# EAGLE board sensor fix (EAGLE 5.06)
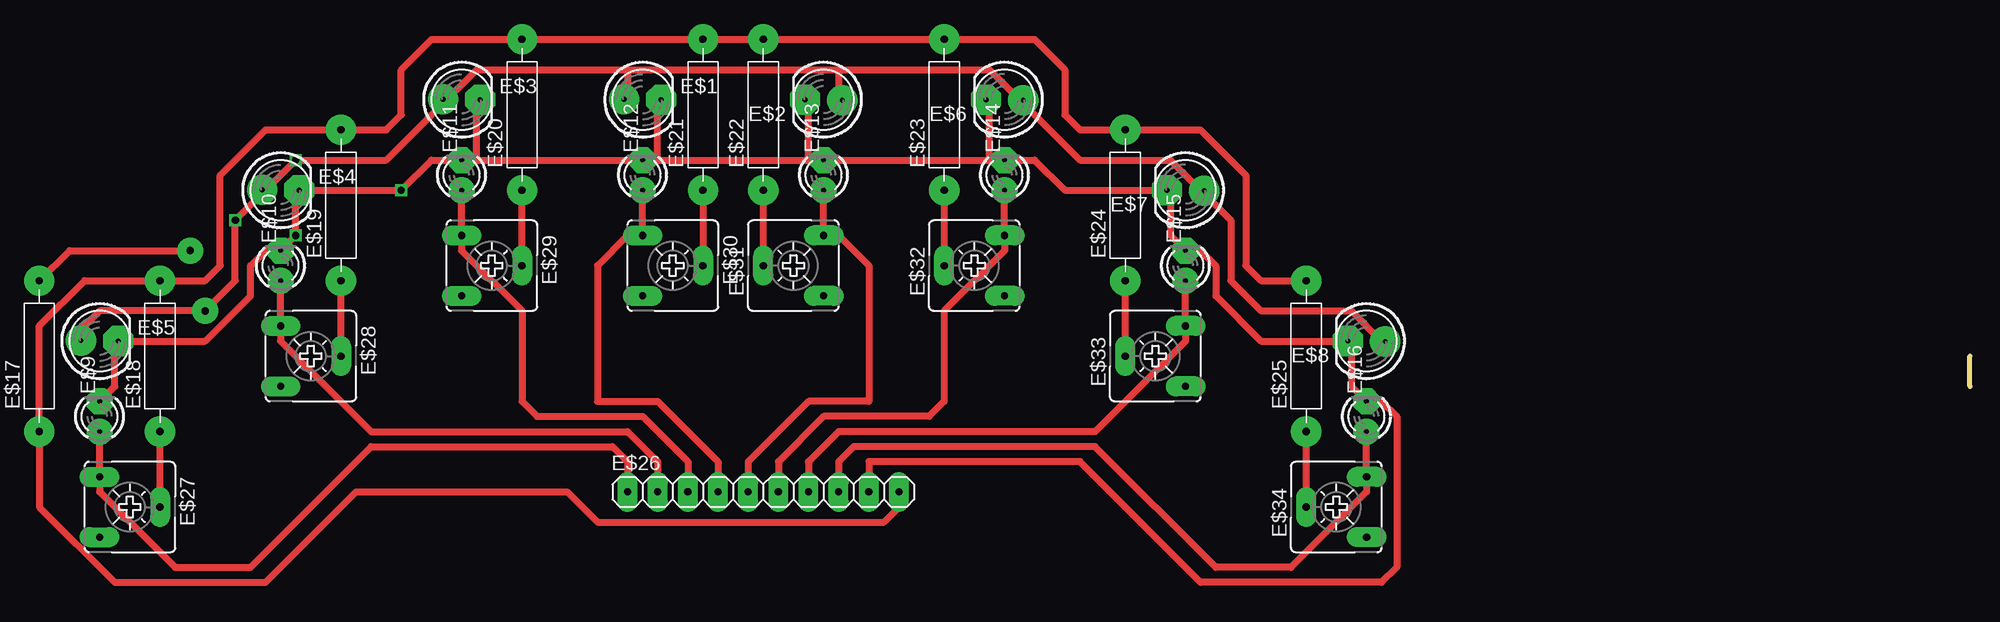
[diagram p0: board, top side]
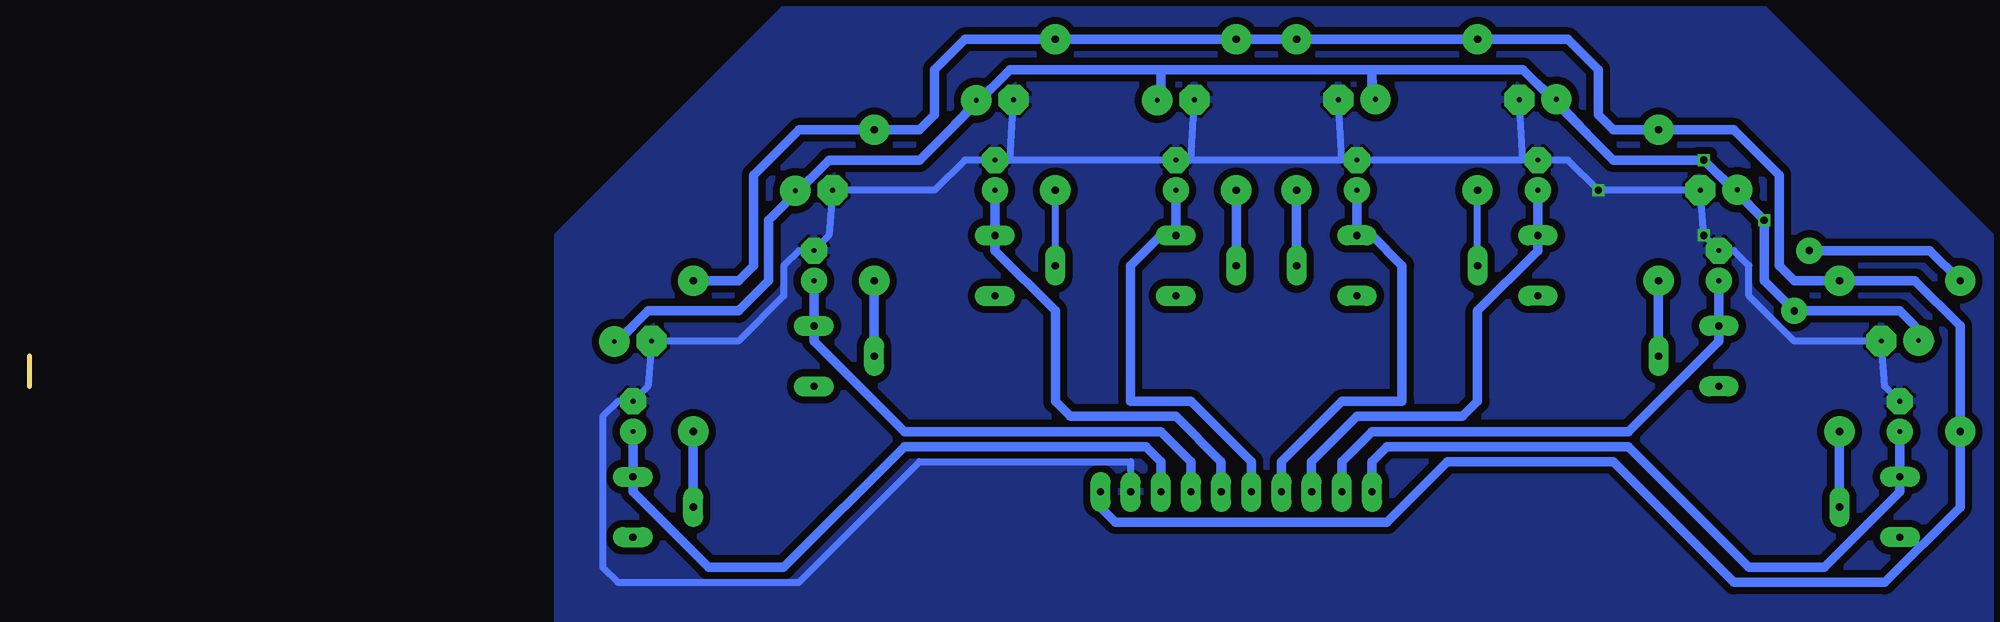
[diagram p1: board, bottom side, seen from below]

Size 0 x 2.54 mm. Coordinates in mm from the lower left corner, seen from the top.
Outline: 0,0 0,2.54
Copper layers (1*16): Top 0.035mm / dielectric 1.5mm / Bottom 0.035mm
Design rules "default": minimum track width 10mil, minimum drill 24mil, track to track 8mil, track to pad 8mil, pad to pad 8mil, via to via 8mil, smd to smd 8mil, copper to edge 40mil, drill to drill 8mil, minimum pad ring 10mil, minimum via ring 8mil, stop-mask expansion 4mil, vias tented up to drill 0mil, thermal gap 10mil

## Footprints (pad centres in the part's own frame; a part is rotated, then mirrored left to right if it is on the bottom)
LED5MM = drill 0.406 pad 2.54 round: A -1.568,0.044 | drill 0.406 pad 2.54 octagon: K 1.568,0
LED3MM = drill 0.406 pad 2.184 round: A -1.27,0 | drill 0.406 pad 2.184 octagon: K 1.27,0
R-12,5 = drill 0.61 pad 2.54 round: 1 -6.35,0; 2 6.35,0
1X10 = drill 0.6 pad 1.676 long: 1 -11.43,0; 2 -8.89,0; 3 -6.35,0; 4 -3.81,0; 5 -1.27,0; 6 1.27,0; 7 3.81,0; 8 6.35,0; 9 8.89,0; 10 11.43,0
CA6V = drill 0.61 pad 1.676 long: A -2.54,-2.54; E 2.54,-2.54; S 0,2.54

## Placement (x,y rotation side)
E$1  [LED5MM]  -111.76,24.13 0 top  (outside the outline)
E$2  [LED5MM]  -96.52,24.13 180 top  (outside the outline)
E$3  [LED5MM]  -127,24.13 0 top  (outside the outline)
E$4  [LED5MM]  -142.24,16.51 0 top  (outside the outline)
E$5  [LED5MM]  -157.48,3.81 0 top  (outside the outline)
E$6  [LED5MM]  -81.28,24.13 180 top  (outside the outline)
E$7  [LED5MM]  -66.04,16.51 180 top  (outside the outline)
E$8  [LED5MM]  -50.8,3.81 180 top  (outside the outline)
E$9  [LED3MM]  -157.48,-2.54 90 top  (outside the outline)
E$10  [LED3MM]  -142.24,10.16 90 top  (outside the outline)
E$11  [LED3MM]  -127,17.78 90 top  (outside the outline)
E$12  [LED3MM]  -111.76,17.78 90 top  (outside the outline)
E$13  [LED3MM]  -96.52,17.78 90 top  (outside the outline)
E$14  [LED3MM]  -81.28,17.78 90 top  (outside the outline)
E$15  [LED3MM]  -66.04,10.16 90 top  (outside the outline)
E$16  [LED3MM]  -50.8,-2.54 90 top  (outside the outline)
E$17  [R-12,5]  -162.56,2.54 90 top  (outside the outline)
E$18  [R-12,5]  -152.4,2.54 90 top  (outside the outline)
E$19  [R-12,5]  -137.16,15.24 90 top  (outside the outline)
E$20  [R-12,5]  -121.92,22.86 90 top  (outside the outline)
E$21  [R-12,5]  -106.68,22.86 90 top  (outside the outline)
E$22  [R-12,5]  -101.6,22.86 90 top  (outside the outline)
E$23  [R-12,5]  -86.36,22.86 90 top  (outside the outline)
E$24  [R-12,5]  -71.12,15.24 90 top  (outside the outline)
E$25  [R-12,5]  -55.88,2.54 90 top  (outside the outline)
E$26  [1X10]  -101.6,-8.89 0 top  (outside the outline)
E$27  [CA6V]  -154.94,-10.16 270 top  (outside the outline)
E$28  [CA6V]  -139.7,2.54 270 top  (outside the outline)
E$29  [CA6V]  -124.46,10.16 270 top  (outside the outline)
E$30  [CA6V]  -109.22,10.16 270 top  (outside the outline)
E$31  [CA6V]  -99.06,10.16 90 top  (outside the outline)
E$32  [CA6V]  -83.82,10.16 90 top  (outside the outline)
E$33  [CA6V]  -68.58,2.54 90 top  (outside the outline)
E$34  [CA6V]  -53.34,-10.16 90 top  (outside the outline)

## Library data of the parts
E$1-E$16 = led
E$17-E$25 = discrete
E$26 = pinhead
E$27-E$34 = pot

## Nets
S$1: E$9.A E$27.A
S$2: E$18.1 E$27.S
S$3: E$10.A E$28.A
S$4: E$19.1 E$28.S
S$5: E$11.A E$29.A
S$6: E$20.1 E$29.S
S$7: E$12.A E$30.A
S$8: E$21.1 E$30.S
S$9: E$22.1 E$31.S
S$10: E$13.A E$31.E
S$11: E$23.1 E$32.S
S$12: E$14.A E$32.E
S$13: E$24.1 E$33.S
S$15: E$25.1 E$34.S
S$16: E$16.A E$34.E
S$17: E$1.A E$2.A E$3.A E$4.A E$5.A E$6.A E$7.A E$8.A
S$18: E$15.A E$33.E
S$19: E$17.1 E$18.2 E$19.2 E$20.2 E$21.2 E$22.2 E$23.2 E$24.2 E$25.2 E$26.10
S$20: E$17.2
S$21: E$1.K E$2.K E$3.K E$4.K E$5.K E$6.K E$7.K E$8.K E$9.K E$10.K E$11.K E$12.K E$13.K E$14.K E$15.K E$16.K E$26.9

## Tracks (layer width: path | path; a pad name or v marks a point on that pad's centre or on a via)
S$1
  Top 0.61: -113.03,-8.89 -113.03,-6.35 -114.3,-5.08 -134.62,-5.08 -144.78,-15.24 -151.13,-15.24 -157.48,-8.89 E$27.A E$9.A
  Bottom 0.61: E$27.A E$9.A
  Bottom 0.813: -113.03,-8.89 -113.03,-6.35 -114.3,-5.08 -134.62,-5.08 -144.78,-15.24 -151.13,-15.24 -157.48,-8.89 E$27.A E$9.A
S$2
  Top 0.61: E$27.S E$18.1
  Bottom 0.61: E$27.S E$18.1
  Bottom 0.813: E$27.S E$18.1
S$3
  Top 0.61: E$10.A E$28.A -142.24,3.81 -134.62,-3.81 -113.03,-3.81 -110.49,-6.35 -110.49,-8.89
  Bottom 0.61: E$28.A E$10.A
  Bottom 0.813: -110.49,-8.89 -110.49,-6.35 -113.03,-3.81 -134.62,-3.81 -142.24,3.81 E$28.A E$10.A
S$4
  Top 0.61: E$28.S E$19.1
  Bottom 0.61: E$28.S E$19.1
  Bottom 0.813: E$28.S E$19.1
S$5
  Top 0.61: -107.95,-8.89 -107.95,-6.35 -111.76,-2.54 -120.65,-2.54 -121.92,-1.27 -121.92,6.35 -127,11.43 E$29.A E$11.A
  Bottom 0.61: E$29.A E$11.A | -107.95,-6.35 -107.95,-8.89
  Bottom 0.813: E$11.A E$29.A -127,11.43 -121.92,6.35 -121.92,-1.27 -120.65,-2.54 -111.76,-2.54 -107.95,-6.35 -107.95,-10.16
S$6
  Top 0.61: E$29.S E$20.1 E$29.S
  Bottom 0.61: E$29.S E$20.1
S$7
  Top 0.61: E$12.A E$30.A -113.03,12.7 -115.57,10.16 -115.57,-1.27 -110.49,-1.27 -105.41,-6.35 -105.41,-8.89
  Bottom 0.61: E$30.A E$12.A
  Bottom 0.813: -105.41,-8.89 -105.41,-6.35 -110.49,-1.27 -115.57,-1.27 -115.57,10.16 -113.03,12.7 E$30.A E$12.A
S$8
  Top 0.61: E$21.1 E$30.S
  Bottom 0.61: E$21.1 E$30.S
  Bottom 0.813: -106.68,8.89 E$21.1
S$9
  Top 0.61: E$22.1 E$31.S
  Bottom 0.61: E$22.1 E$31.S
  Bottom 0.813: -101.6,8.89 E$22.1
S$10
  Top 0.61: -102.87,-8.89 -102.87,-6.35 -97.79,-1.27 -92.71,-1.27 -92.71,10.16 -95.25,12.7 E$31.E E$13.A
  Bottom 0.61: E$31.E E$13.A
  Bottom 0.813: E$13.A E$31.E -95.25,12.7 -92.71,10.16 -92.71,-1.27 -97.79,-1.27 -102.87,-6.35 -102.87,-8.89
S$11
  Top 0.61: E$23.1 E$32.S
  Bottom 0.61: -86.36,8.89 E$23.1
S$12
  Top 0.61: E$14.A E$32.E -81.28,11.43 -86.36,6.35 -86.36,-1.27 -87.63,-2.54 -96.52,-2.54 -100.33,-6.35 -100.33,-8.89
  Bottom 0.61: E$32.E E$14.A
  Bottom 0.813: -100.33,-8.89 -100.33,-6.35 -96.52,-2.54 -87.63,-2.54 -86.36,-1.27 -86.36,6.35 -81.28,11.43 E$32.E E$14.A
S$13
  Top 0.61: E$33.S E$24.1
  Bottom 0.61: E$33.S E$24.1
  Bottom 0.813: E$33.S E$24.1
S$15
  Top 0.61: E$34.S E$25.1
  Bottom 0.61: E$34.S E$25.1
  Bottom 0.813: E$34.S E$25.1
S$16
  Top 0.61: E$16.A E$34.E -50.8,-8.89 -57.15,-15.24 -63.5,-15.24 -73.66,-5.08 -93.98,-5.08 -95.25,-6.35 -95.25,-8.89
  Bottom 0.61: E$34.E E$16.A
  Bottom 0.813: -95.25,-8.89 -95.25,-6.35 -93.98,-5.08 -73.66,-5.08 -63.5,-15.24 -57.15,-15.24 -50.8,-8.89 E$34.E E$16.A
S$17  (via drill 0.6, 0.61 pad 2.18)
  Top 0.61: -158.75,3.81 -158.75,5.08 -157.48,6.35 v-148.59,6.35 -146.05,8.89 v-146.05,13.97 v-140.97,19.05 -133.35,19.05 -125.73,26.67 -113.03,26.67 | -113.03,26.67 -113.03,24.13 | -113.03,26.67 -95.25,26.67 | -95.25,26.67 -95.25,24.13 | -95.25,26.67 -82.55,26.67 -74.93,19.05 -67.31,19.05 -62.23,13.97 -62.23,8.89 -59.69,6.35 -52.07,6.35 -49.53,3.81
  Bottom 0.61: E$5.A -158.75,5.08 -157.48,6.35 | v-146.05,13.97 E$4.A v-140.97,19.05 | -133.35,19.05 E$3.A -125.73,26.67 | -113.03,26.67 E$1.A | -95.25,26.67 E$2.A | -82.55,26.67 E$6.A -74.93,19.05 | -67.31,19.05 E$7.A -62.23,13.97 | -52.07,6.35 E$8.A
  Bottom 0.813: -49.53,3.81 -52.07,6.35 -59.69,6.35 -62.23,8.89 -62.23,13.97 -67.31,19.05 -74.93,19.05 -82.55,26.67 -95.25,26.67 | -95.25,26.67 -95.25,24.13 | -113.03,26.67 -95.25,26.67 | -113.03,26.67 -113.03,24.13 | -113.03,26.67 -125.73,26.67 -133.35,19.05 v-140.97,19.05 v-146.05,13.97 -146.05,8.89 v-148.59,6.35 -157.48,6.35 -160.02,3.81
S$18
  Top 0.61: -97.79,-8.89 -97.79,-6.35 -95.25,-3.81 -73.66,-3.81 -66.04,3.81 E$33.E E$15.A
  Bottom 0.61: E$33.E E$15.A
  Bottom 0.813: E$15.A E$33.E -66.04,3.81 -73.66,-3.81 -95.25,-3.81 -97.79,-6.35 -97.79,-8.89
S$19
  Top 0.61: E$25.2 -59.69,8.89 -60.96,10.16 -60.96,17.78 -64.77,21.59 E$24.2 -74.93,21.59 -76.2,22.86 -76.2,26.67 -78.74,29.21 E$22.2 E$21.2 E$20.2 -129.54,29.21 -132.08,26.67 -132.08,22.86 -133.35,21.59 E$19.2 -143.51,21.59 -147.32,17.78 -147.32,10.16 -148.59,8.89 E$18.2 -158.75,8.89 -162.56,5.08 E$17.1 -162.56,-10.16 -156.21,-16.51 -143.51,-16.51 -135.89,-8.89 -118.11,-8.89 -115.57,-11.43 -91.44,-11.43 -90.17,-10.16 E$26.10
  Bottom 0.61: E$20.2 E$21.2 E$22.2 E$23.2
  Bottom 0.813: E$26.10 -90.17,-10.16 -91.44,-11.43 -114.3,-11.43 -119.38,-6.35 -133.35,-6.35 -143.51,-16.51 -156.21,-16.51 -162.56,-10.16 E$17.1 -162.56,5.08 -158.75,8.89 E$18.2 -148.59,8.89 -147.32,10.16 -147.32,17.78 -143.51,21.59 E$19.2 -133.35,21.59 -132.08,22.86 -132.08,26.67 -129.54,29.21 E$20.2 E$21.2 E$22.2 E$23.2 -78.74,29.21 -76.2,26.67 -76.2,22.86 -74.93,21.59 E$24.2 -64.77,21.59 -60.96,17.78 -60.96,10.16 -59.69,8.89 E$25.2
S$20  (via drill 0.61 pad 2.18)
  Top 0.61: E$17.2 -160.02,11.43 v-149.86,11.43
  Bottom 0.813: E$17.2 -160.02,11.43 v-149.86,11.43
S$21  (via drill 0.6)
  Top 0.61: E$26.9 -92.71,-6.35 -74.93,-6.35 -64.77,-16.51 -49.53,-16.51 -48.26,-15.24 -48.26,-2.54 -49.53,-1.27 E$16.K -52.07,0 -52.07,3.81 -59.69,3.81 -63.5,7.62 -63.5,10.16 -64.77,11.43 E$15.K -67.31,12.7 -67.31,16.51 -76.2,16.51 -78.74,19.05 E$14.K -82.55,19.05 | -97.79,19.05 -97.79,24.13 | -82.55,19.05 -82.55,24.13 | -97.79,19.05 E$13.K E$12.K | -110.49,19.05 -110.49,24.13 | -110.49,19.05 -97.79,19.05 | E$12.K -110.49,19.05 | E$12.K -82.55,19.05 | -125.73,19.05 -125.73,24.13 | -125.73,19.05 E$12.K | -125.73,19.05 E$11.K -129.54,19.05 v-132.08,16.51 -140.97,16.51 v-140.97,12.7 E$10.K -143.51,11.43 -144.78,10.16 -144.78,7.62 -148.59,3.81 -156.21,3.81 -156.21,0 E$9.K
  Bottom 0.61: E$26.9 -92.71,-6.35 -74.93,-6.35 -64.77,-16.51 -49.53,-16.51 -48.26,-15.24 -48.26,-2.54 -49.53,-1.27 E$16.K -52.07,0 E$8.K -59.69,3.81 -63.5,7.62 -63.5,10.16 -64.77,11.43 E$15.K -67.31,12.7 E$7.K -76.2,16.51 -78.74,19.05 E$14.K -82.55,19.05 | -82.55,19.05 E$6.K | -97.79,19.05 E$2.K | -97.79,19.05 E$13.K -82.55,19.05 | -110.49,19.05 E$1.K | -110.49,19.05 -97.79,19.05 | -110.49,19.05 E$12.K -125.73,19.05 | -125.73,19.05 E$3.K | -125.73,19.05 E$11.K -129.54,19.05 v-132.08,16.51 E$4.K v-140.97,12.7 E$10.K -143.51,11.43 -144.78,10.16 -144.78,7.62 -148.59,3.81 E$5.K -156.21,0 E$9.K
  pour Bottom (isolate 0.61): -165.1,-20.32 -44.45,-20.32 -44.45,12.7 -63.5,31.75 -146.05,31.75 -165.1,12.7